# Allegro board Relay.brd
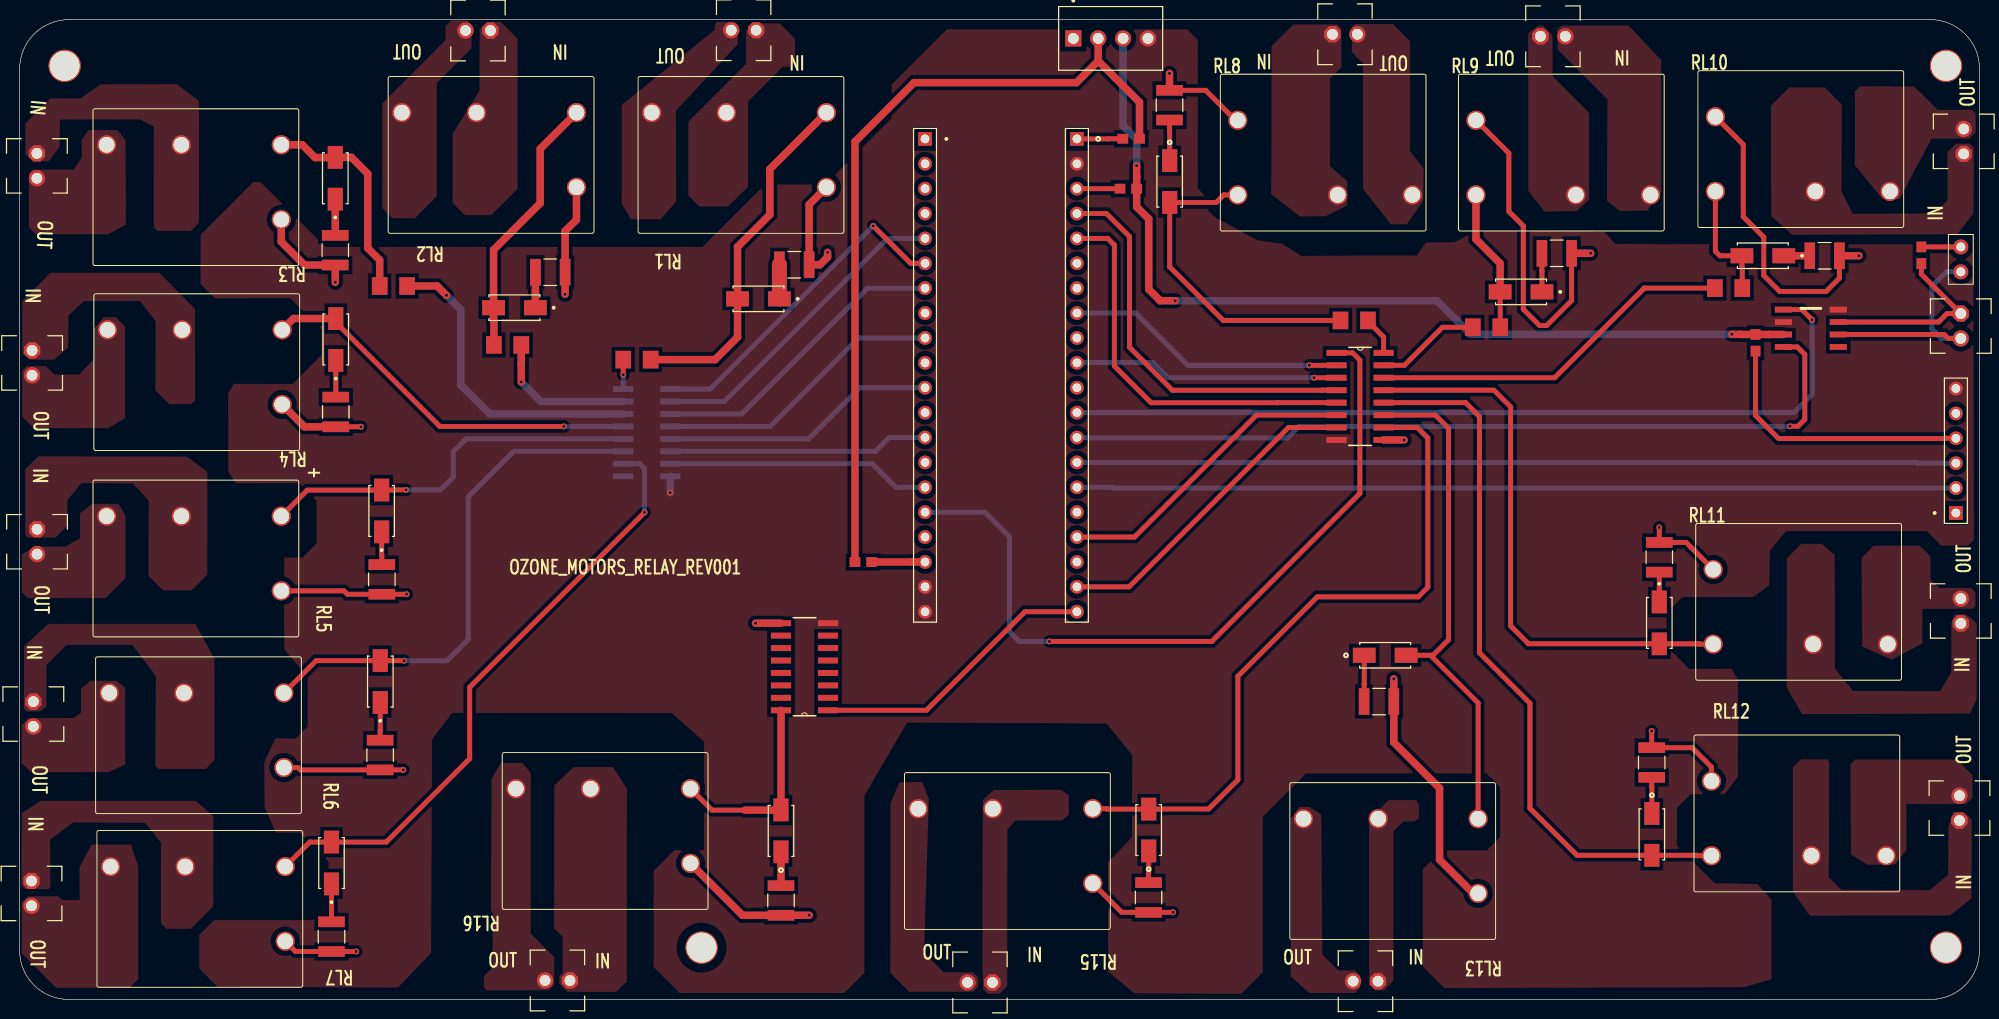
[diagram p0: board, top side]
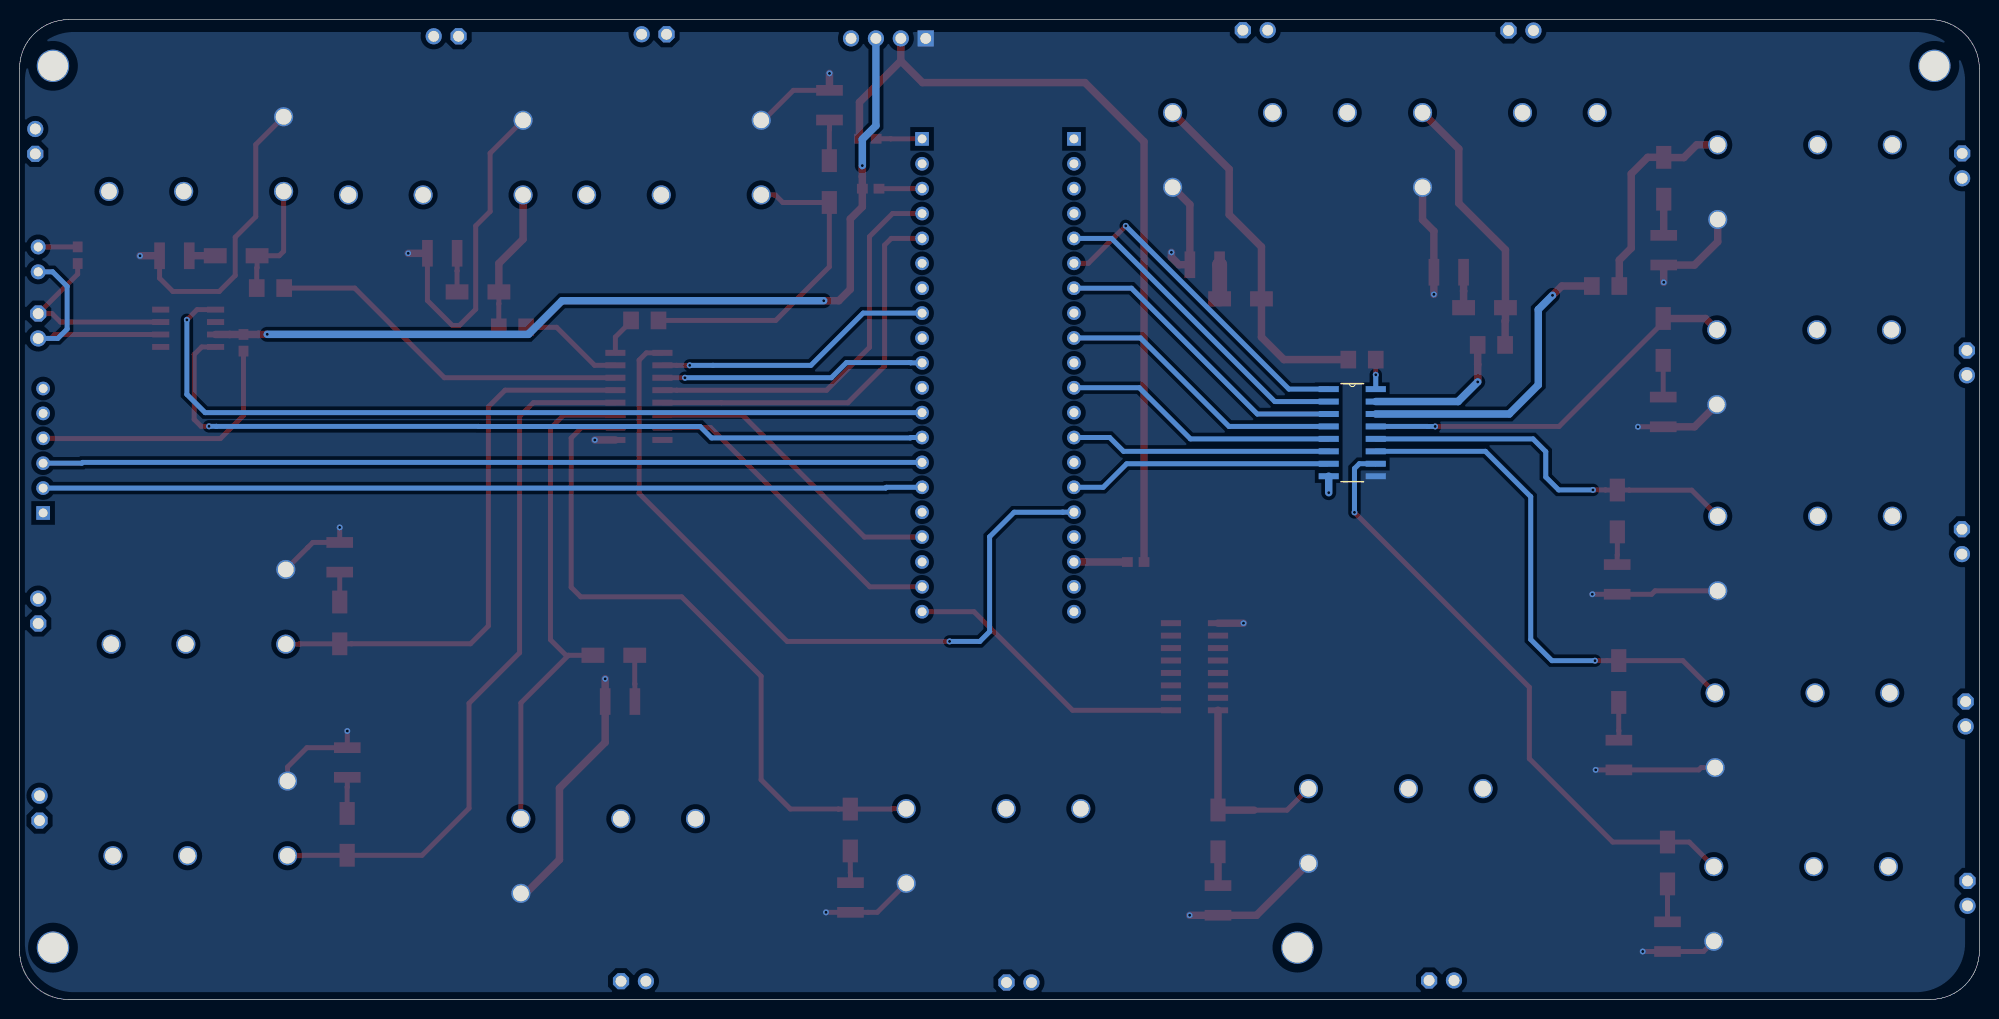
[diagram p1: board, bottom side, seen from below]

Outline 200 x 100 mm; copper layers: TOP, BOTTOM. Coordinates in mm from the lower left corner of the outline.
Outline path: 0,94.88 arc(1.5,98.5) 5.12,100 195,100 arc(196.91,99.62) 198.54,98.54 198.66,98.42 arc(199.65,96.93) 200,95.18 200,4.85 arc(198.58,1.42) 195.16,0 4.96,0 arc(1.45,1.45) 0,4.96 0,94.88 ; 0,95 arc(1.47,98.54) 5,100 195,100 arc(198.54,98.54) 200,95 200,5 arc(198.54,1.46) 195,0 5,0 arc(1.47,1.46) 0,5 0,95

## Placement (name value [footprint] x y rotation side)
D9  DIODE  [DIOM5226X240N]  75.4 71.5 180 top
D10  DIODE  [DIOM5226X240N]  50.5 70.6 180 top
D11  DIODE  [DIOM5226X240N]  32.22 83.81 90 top
D12  DIODE  [DIOM5226X240N]  32.27 67.36 90 top
D13  DIODE  [DIOM5226X240N]  36.95 49.85 90 top
D14  DIODE  [DIOM5226X240N]  36.81 32.44 90 top
D15  DIODE  [DIOM5226X240N]  31.83 13.92 90 top
D16  DIODE  [DIOM5226X240N]  77.7 17.2 90 top
D17  DIODE  [DIOM5226X240N]  153.23 72.21 180 top
D18  DIODE  [DIOM5226X240N]  177.9 75.9 180 top
D19  DIODE  [DIOM5226X240N]  167.33 38.43 270 top
D20  DIODE  [DIOM5226X240N]  166.58 16.84 270 top
D21  DIODE  [DIOM5226X240N]  139.36 35.12 0 top
D22  DIODE  [DIOM5226X240N]  115.23 17.29 90 top
D23  DIODE  [DIOM5226X240N]  117.37 83.47 270 top
J1  CON2  [1725656]  75.17 98.92 180 top
J2  CON2  [1725656]  48.05 98.89 180 top
J3  CON2  [1725656]  1.76 86.35 270 top
J4  CON2  [1725656]  1.28 66.24 270 top
J5  CON2  [1725656]  1.78 47.99 270 top
J6  CON2  [1725656]  1.4 30.4 270 top
J7  CON2  [1725656]  1.21 12.09 270 top
J8  CON2  [1725656]  56.16 1.93 180 top
J9  CON2  [1725656]  133.98 98.51 0 top
J10  CON2  [1725656]  155.2 98.3 0 top
J11  CON2  [1725656]  198.4 86.3 90 top
J12  CON2  [1725656]  198.1 38.37 90 top
J13  CON2  [1725656]  197.97 18.25 90 top
J14  CON2  [1725656]  138.63 1.86 180 top
J15  CON2  [1725656]  99.28 1.73 180 top
J16  CON20  [TE_2-87224-0]  92.4 63.7 270 top
J17  CON20  [TE_2-87224-0]  107.9 63.7 270 top
J18  CON2  [JUMPER2]  198.1 76.8 270 top
J19  CON2  [1725656]  198.1 70 270 top
J20  UART  [TE_4-103327-6]  197.6 56 90 top
J21  Power  [TE_1546215-4]  111.34 98.08 0 top
NOREF  -  [unnamed]  69.58 5.53 0 top
NOREF#2  -  [unnamed]  4.58 95.53 0 top
NOREF#3  -  [unnamed]  196.58 5.53 0 top
NOREF#4  -  [unnamed]  196.58 95.53 0 top
R1  0 OHM  [RESC3216X65]  63 65.3 0 top
R2  120K  [RESC3225X60N]  79.06 74.98 0 top
R3  120K  [RESC3225X60N]  54.16 74.22 0 top
R4  0 OHM  [RESC3216X65]  49.8 66.8 180 top
R5  120K  [RESC3225X60N]  32.22 76.47 270 top
R6  0 OHM  [RESC3216X65]  38.15 72.81 180 top
R7  120K  [RESC3225X60N]  32.27 59.96 270 top
R8  120K  [RESC3225X60N]  36.96 42.87 270 top
R9  120K  [RESC3225X60N]  36.79 24.94 270 top
R10  120K  [RESC3225X60N]  31.83 6.4 270 top
R11  0 OHM  [RESC3216X65]  136.2 69.3 180 top
R12  120K  [RESC3225X60N]  117.35 91.27 90 top
R13  120K  [RESC3225X60N]  156.87 76.15 0 top
R14  0 OHM  [RESC3216X65]  149.7 68.6 0 top
R15  120K  [RESC3225X60N]  184.2 75.9 0 top
R16  0 OHM  [RESC3216X65]  174.4 72.6 0 top
R17  120K  [RESC3225X60N]  167.33 45.12 90 top
R18  120K  [RESC3225X60N]  166.56 24.18 90 top
R19  120K  [RESC3225X60N]  138.73 30.4 0 top
R20  120K  [RESC3225X60N]  115.21 10.4 270 top
R21  0R  [0603]  86.1 44.64 180 top
R22  0R  [0603]  113.15 82.75 0 top
R23  0R  [0603]  113.44 87.84 0 top
R24  0R  [0603]  177.15 67.02 90 top
R25  120R  [0603]  194.08 75.96 90 top
R26  120K  [RESC3225X60N]  77.7 10.1 270 top
RL1  RELAY SPST  [3122644]  82.33 82.89 180 top
RL2  RELAY SPST  [3122644]  56.83 82.89 180 top
RL3  RELAY SPST  [3122644]  26.7 79.6 180 top
RL4  RELAY SPST  [3122644]  26.79 60.72 180 top
RL5  RELAY SPST  [3122644]  26.7 41.7 180 top
RL6  RELAY SPST  [3122644]  26.97 23.66 180 top
RL7  RELAY SPST  [3122644]  27.11 5.93 180 top
RL8  RELAY SPST  [3122644]  124.32 89.73 0 top
RL9  RELAY SPST  [3122644]  148.62 89.73 0 top
RL10  RELAY SPST  [3122644]  173.06 90.09 0 top
RL11  RELAY SPST  [3122644]  172.84 43.88 0 top
RL12  RELAY SPST  [3122644]  172.66 22.29 0 top
RL13  RELAY SPST  [3122644]  148.84 10.82 180 top
RL15  RELAY SPST  [3122644]  109.52 11.84 180 top
RL16  RELAY SPST  [3122644]  68.47 13.89 180 top
U1  ULN2003A  [SOIC127P600X175-16N]  61.6 53.4 180 bottom
U2  ULN2003A  [SOIC127P600X175-16N]  139.2 57.1 0 top
U3  TJA1050  [SOP8]  182.8 68.5 270 top
U4  ULN2003A  [SOIC127P600X175-16N]  77.7 38.4 180 top

## Library data of the parts
D9 D10 D12-D17 D19-D23 = DIODE_16
D11 D18 = DIODE_17
J1-J15 J18 J19 = CON2_0
J16 = CON20_3
J17 = CON20_2
J20 = CON6_0
J21 = CON4_0
R1 R4 R6 R11 R14 R16 = RESISTOR_4
R2 R3 R5 R7-R10 R12 R13 R15 R17-R20 R26 = RESISTOR_6
R21-R25 = R
RL1 = RELAY SPST_0
RL2 RL4-RL13 RL15 RL16 = RELAY SPST_1
RL3 = RELAY SPST_2
U1 U2 = ULN2003A_1
U3 = TPS563200_1
U4 = ULN2003A_0

## Footprints (pads in the part's own frame, mm; a bottom-side part is the same pattern mirrored in y, then rotated)
0603
  rect 1.1x1 smd: 1(-0.85,0) 2(0.85,0)
1725656
  rrect 1.65x1.65 hole 1.1: 1(0,0)
  round 1.65 hole 1.1: 2(2.54,0)
3122644
  round 1.95 hole 1.6: 1(0,0) 2(0,-7.62) 3(10.2,-7.62) 4(17.82,-7.62)
DIOM5226X240N
  rect 2.33x1.55 smd: A(2.135,0) C(-2.135,0)
JUMPER2
  round 1.524 hole 0.914: 1(0,0) 2(2.54,0)
RESC3216X65
  rect 1.6x1.8 smd: 1(-1.4,0) 2(1.4,0)
RESC3225X60N
  rect 1.09x2.72 smd: 1(-1.515,0) 2(1.515,0)
SOIC127P600X175-16N
  rect 2.057x0.61 smd: 1(-4.801,8.89) 2(-4.801,7.62) 3(-4.801,6.35) 4(-4.801,5.08) 5(-4.801,3.81) 6(-4.801,2.54) 7(-4.801,1.27) 8(-4.801,0) 9(0,0) 10(0,1.27) 11(0,2.54) 12(0,3.81) 13(0,5.08) 14(0,6.35) 15(0,7.62) 16(0,8.89)
SOP8
  rect 0.6x1.75 smd: 1(-1.905,-2.8) 2(-0.635,-2.8) 3(0.635,-2.8) 4(1.905,-2.8) 5(1.905,2.8) 6(0.635,2.8) 7(-0.635,2.8) 8(-1.905,2.8)
TE_2-87224-0
  rect 1.397x1.397 hole 0.889: 1(-24.13,0)
  round 1.397 hole 0.889: 2(-21.59,0) 3(-19.05,0) 4(-16.51,0) 5(-13.97,0) 6(-11.43,0) 7(-8.89,0) 8(-6.35,0) 9(-3.81,0) 10(-1.27,0) 11(1.27,0) 12(3.81,0) 13(6.35,0) 14(8.89,0) 15(11.43,0) 16(13.97,0) 17(16.51,0) 18(19.05,0) 19(21.59,0) 20(24.13,0)
TE_4-103327-6
  rect 1.398x1.398 hole 0.89: 1(-6.35,0)
  round 1.398 hole 0.89: 2(-3.81,0) 3(-1.27,0) 4(1.27,0) 5(3.81,0) 6(6.35,0)
TE_1546215-4
  rect 1.65x1.65 hole 1.1: 1(-3.81,0)
  round 1.65 hole 1.1: 2(-1.27,0) 3(1.27,0) 4(3.81,0)
unnamed
  round 3.302 hole 3.048: (0.013,-0.244)

## Nets
3V3: J21.2 R21.2 R23.2
5VCC: J21.3 R22.2 R24.2 U3.3(VDD)
+12V: J21.1 R2.2 R3.2 R5.2 R7.2 R8.2 R9.2 R10.2 R12.2 R13.2 R15.2 R17.2 R18.2 R19.2 R20.2 R26.2 RL1.1(COIL1) RL2.1 RL3.1 RL4.1 RL5.1 RL6.1 RL7.1 RL8.1 RL9.1 RL10.1 RL11.1 RL12.1 RL13.1 RL15.1 RL16.1 U1.9(COM) U2.9(COM) U4.9(COM)
GND: J16.19 J16.20 J17.2 J20.6 J21.4 U1.8(GND) U2.8(GND) U3.2(VSS) U3.8(RS) U4.8(GND)
F1: J16.4
F2: J16.3
F3: J16.8
F4: J16.10
F5: J16.12
F6: J16.14
F9: J17.6
F10: J17.7
F11: J17.9
F12: J17.11
F13: J17.16
F14: J17.18
P_RX: J17.14 J20.3
P_TX: J17.15 J20.2
PB15/OUT: D15.A RL7.2 U1.10(7C)
R_RLY_IN: D9.A R1.2(B) RL1.2(COIL2)
R_RLY_IN_77343: D23.A R11.2(B) RL8.2
RE1: J1.1 RL1.3(COMMON)
RE1/OUT: J1.2 RL1.4(NO)
RE2: J2.1 RL2.3
RE2/OUT: J2.2 RL2.4
RE3: J3.1 RL3.3
RE3/OUT: J3.2 RL3.4
RE4: J4.1 RL4.3
RE4/OUT: J4.2 RL4.4
RE5: J5.1 RL5.3
RE5/OUT: J5.2 RL5.4
RE6: J6.1 RL6.3
RE6/OUT: J6.2 RL6.4
RE7: J7.1 RL7.3
RE7/OUT: J7.2 RL7.4
RE8: J9.1 RL8.3
RE8/OUT: J9.2 RL8.4
RE9: J10.1 RL9.3
RE9/OUT: J10.2 RL9.4
RE10: J11.1 RL10.3
RE10/OUT: J11.2 RL10.4
RE11: J12.1 RL11.3
RE11/OUT: J12.2 RL11.4
RE12: J13.1 RL12.3
RE12/OUT: J13.2 RL12.4
RE13: J14.1 RL13.3
RE13/OUT: J14.2 RL13.4
RE14: D22.A RL15.2 U2.10(7C)
RE14/OUT: J15.2 RL15.4
RE14IN: J15.1 RL15.3
RE15: J8.1 RL16.3
RE15/OUT: J8.2 RL16.4
REL1: J16.6 U1.1(1B)
REL2: J16.5 U1.2(2B)
REL3: J16.7 U1.3(3B)
REL4: J16.9 U1.4(4B)
REL5: J16.11 U1.5(5B)
REL6: J16.13 U1.6(6B)
REL7: J16.15 U1.7(7B)
REL8: J16.16 U2.1(1B)
REL9: J17.8 U2.2(2B)
REL10: J17.10 U2.3(3B)
REL11: J17.4 U2.4(4B)
REL12: J17.5 U2.5(5B)
REL13: J17.17 U2.6(6B)
REL14: J17.19 U2.7(7B)
REL15: J17.20 U4.1(1B)
RXD: J17.13 U3.4(RXD)
TXD: J17.12 U3.1(TXD)
Y_RLY_IN: D11.A R6.2(B) RL3.2
Y_RLY_IN_77347: D18.A R16.2(B) RL10.2
N62759: J17.1 R23.1
N63115: J19.1 R25.1 U3.7(CANH)
N63135: J18.2 J19.2 U3.6(CANL)
N63175: J18.1 R25.2
N63380: J17.3 R22.1
N65482: J16.18 R21.1
N68083: D10.A R4.2(B) RL2.2
N68351: D12.A RL4.2 U1.13(4C)
N68452: D13.A RL5.2 U1.12(5C)
N68553: D14.A RL6.2 U1.11(6C)
N75685: D16.A RL16.2 U4.16(1C)
N75693: D16.C R26.1
N77327: D18.C R15.1
N77341: D23.C R12.1
N77357: R11.1(A) U2.16(1C)
N77361: R16.1(A) U2.14(3C)
N77381: R14.1(A) U2.15(2C)
N77393: D17.C R13.1
N77395: D17.A R14.2(B) RL9.2
N77409: D19.C R17.1
N77411: D19.A RL11.2 U2.13(4C)
N77427: D20.C R18.1
N77429: D20.A RL12.2 U2.12(5C)
N77445: D21.C R19.1
N77447: D21.A RL13.2 U2.11(6C)
N77463: D22.C R20.1
N80676: J20.4 R24.1
N20681583: D11.C R5.1
N20681625: D9.C R2.1
N20681734: R1.1(A) U1.16(1C)
N20681738: R6.1(A) U1.14(3C)
N20741071: R4.1(A) U1.15(2C)
N20741150: D10.C R3.1
N20741386: D12.C R7.1
N20741709: D13.C R8.1
N20741894: D14.C R9.1
N20742069: D15.C R10.1

Pads without a net: J16 1 2 17; J20 1 5; U3 5; U4 2 3 4 5 6 7 10 11 12 13 14 15

## Via types
v1: diameter 0.61, hole 0.305, TOP to BOTTOM, 34 vias

## Routing (per net, layer and track width the routed paths; a pad name or vN(x,y) marks a point on that pad's centre or on a via; arc(x,y) is an arc through that point)
3V3: length 83.1
  TOP w0.762: 110.07,95.79 114.29,91.57 R23.2 ; 110.07,95.79 107.86,93.57 91.28,93.57 85.25,87.55 R21.2 ; 110.07,95.79 J21.2
5VCC: length 93.4
  TOP w0.762: v1(174.73,67.88) 175.62,67.88 175.64,67.87 R24.2 178.57,67.87 178.57,67.87 U3.3 ; v1(117.94,71.31) 116.4,71.31 115.23,72.48 115.23,79.66 114,80.89 R22.2 114,83.99 v1(114,85.1)
  BOTTOM w0.762: v1(174.73,67.88) 148.08,67.88 144.65,71.31 v1(117.94,71.31) ; v1(114,85.1) 114,87.79 112.61,89.17 J21.3
+12V: length 223.8
  TOP w0.508: RL10.1 175.9,87.24 175.9,79.89 178,77.79 178,73.88 179.63,72.26 184.36,72.26 185.72,73.61 R15.2 ; v1(166.56,27.39) R18.2 170.68,25.69 172.66,23.72 RL12.1 ; R7.2 v1(34.85,58.44) ; RL8.1 124.09,89.73 121.04,92.78 R12.2 ; v1(39.5,41.35) R8.2 33.45,41.35 33.1,41.7 RL5.1 ; v1(117.71,8.89) R20.2 112.48,8.89 RL15.1 ; RL7.1 28.15,4.89 R10.2 v1(34.36,4.89) ; v1(39.16,23.43) R9.2 28.64,23.43 28.4,23.66 RL6.1 ; RL9.1 151.98,86.37 151.98,80.42 153.46,78.95 153.46,70.44 155.12,68.78 155.84,68.78 158.38,71.33 R13.2 ; RL11.1 170.59,46.13 170.08,46.64 R17.2 v1(167.33,48.17)
  TOP w0.762: R12.2 v1(117.35,94.51) ; U2.9 v1(141.3,57.1) ; v1(55.67,71.96) R3.2 55.67,78.41 56.83,79.57 RL2.1 ; RL13.1 148.35,10.82 144.91,14.26 144.91,21.56 140.24,26.23 R19.2 v1(140.24,32.72) ; v1(32.22,73.19) R5.2 29.08,74.95 26.7,77.33 RL3.1 ; RL16.1 73.77,8.58 R26.2 v1(80.59,8.58) ; RL4.1 29.07,58.44 R7.2 ; R13.2 v1(160.34,76.15) ; U4.9 v1(75.1,38.4) ; v1(82.46,76.25) 82.46,75.77 81.68,74.98 R2.2 80.57,81.13 RL1.1 ; R15.2 v1(187.71,75.9)
GND: length 1.7
  BOTTOM w0.762: U1.8 v1(66.4,51.72)
P_RX: length 89.7
  BOTTOM w0.508: J17.14 193.57,54.81 193.65,54.73 J20.3
P_TX: length 89.7
  BOTTOM w0.508: J20.2 111.62,52.19 111.54,52.27 J17.15
PB15/OUT: length 62.8
  TOP w0.508: v1(63.78,49.71) 45.93,31.86 45.93,24.57 37.42,16.06 D15.A 29.61,16.06 RL7.2
  BOTTOM w0.508: v1(63.78,49.71) 63.78,54.18 63.28,54.68 61.61,54.68 U1.10
R_RLY_IN: length 36.5
  TOP w0.762: RL1.2 76.56,84.74 76.56,80.1 73.27,76.81 D9.A 73.27,67.6 70.97,65.3 R1.2
R_RLY_IN_77343: length 33.5
  TOP w0.508: R11.2 122.84,69.3 117.37,74.77 D23.A 122.11,81.34 122.89,82.11 RL8.2
RE14: length 70
  TOP w0.508: RL15.2 110.95,19.46 111,19.42 D22.A 116.43,19.42 116.45,19.43 121.34,19.43 124.33,22.42 124.33,32.98 132.43,41.09 142.74,41.09 143.71,42.06 143.71,57.29 142.64,58.37 U2.10
REL1: length 34.5
  TOP w0.508: v1(87.12,78.95) 90.93,75.13 J16.6
  BOTTOM w0.508: U1.1 70.46,62.29 v1(87.12,78.95)
REL2: length 32.9
  BOTTOM w0.508: U1.2 71.91,61.02 88.56,77.67 J16.5
REL3: length 31.3
  BOTTOM w0.508: U1.3 73.7,59.75 86.54,72.59 J16.7
REL4: length 29.7
  BOTTOM w0.508: U1.4 76.59,58.48 85.62,67.51 J16.9
REL5: length 28.2
  BOTTOM w0.508: J16.11 85.74,62.43 80.52,57.21 U1.5
REL6: length 26.6
  BOTTOM w0.508: J16.13 88.76,57.35 87.35,55.94 U1.6
REL7: length 27
  BOTTOM w0.508: U1.7 87.02,54.67 89.42,52.27 J16.15
REL8: length 78.1
  TOP w0.508: v1(105.1,36.54) 121.67,36.54 136.78,51.65 136.78,65.25 136.04,65.99 U2.1
  BOTTOM w0.508: J16.16 93.56,49.73 93.56,49.73 98.5,49.73 101.01,47.22 101.01,37.53 102.01,36.54 v1(105.1,36.54)
REL9: length 28.7
  TOP w0.508: U2.2 132.94,64.72 132.93,64.71 v1(131.62,64.71)
  BOTTOM w0.508: v1(131.62,64.71) 129.24,64.71 129.24,64.71 119.25,64.71 113.91,70.05 J17.8
REL10: length 27.2
  TOP w0.508: U2.3 v1(132.1,63.45)
  BOTTOM w0.508: J17.10 109.06,64.97 109.09,65 115.62,65 117.16,63.45 v1(132.1,63.45)
REL11: length 40.6
  TOP w0.508: J17.4 110.91,80.21 113.27,77.85 113.27,66.55 117.65,62.17 132.93,62.17 132.94,62.18 U2.4
REL12: length 40.7
  TOP w0.508: J17.5 111.05,77.67 111.73,76.99 111.73,64.64 115.47,60.9 128.38,60.9 128.39,60.91 U2.5
REL13: length 31.7
  TOP w0.508: U2.6 126.23,59.64 113.78,47.19 J17.17
REL14: length 33.2
  TOP w0.508: U2.7 129.49,58.37 113.23,42.11 J17.19
REL15: length 29.6
  TOP w0.508: J17.20 102.6,39.57 92.54,29.51 U4.1
RXD: length 84.2
  TOP w0.508: v1(180.67,58.49) 181.48,58.49 182.19,59.2 182.19,65.82 181.42,66.6 U3.4
  BOTTOM w0.508: v1(180.67,58.49) 179.91,58.49 179.9,58.48 153.16,58.48 153.15,58.47 130.55,58.47 129.39,57.31 109.1,57.31 109.06,57.35 J17.13
TXD: length 86.8
  TOP w0.508: U3.1 181.89,70.41 v1(182.93,69.36)
  BOTTOM w0.508: v1(182.93,69.36) 182.93,61.75 181.07,59.89 J17.12
Y_RLY_IN: length 22
  TOP w0.762: R6.2 36.75,75.46 35.53,76.67 35.53,84.26 33.85,85.94 D11.A 32.19,85.92 30.15,85.92 28.85,87.22 RL3.2
Y_RLY_IN_77347: length 12.3
  TOP w0.508: R16.2 175.8,74.66 175.77,74.69 D18.A 173.52,75.9 173.06,76.36 RL10.2
N62759: length 4.7
  TOP w0.508: J17.1 111.1,87.83 111.12,87.84 R23.1
N63115: length 19.6
  TOP w0.508: R25.1 194.08,74.03 J19.1 196.69,70 195.83,69.14 U3.7
N63135: length 23.9
  TOP w0.508: U3.6 196.42,67.87 196.82,67.46 J19.2
  BOTTOM w0.508: J19.2 196.11,67.46 195.15,68.42 195.15,72.78 196.63,74.26 J18.2
N63175: length 4
  TOP w0.508: J18.1 196.88,76.8 196.88,76.81 R25.2
N63380: length 4.4
  TOP w0.508: J17.3 109.06,82.75 109.06,82.75 R22.1
N65482: length 5.5
  TOP w0.762: J16.18 91.12,44.65 91.11,44.64 R21.1
N68083: length 27.2
  TOP w0.762: R4.2 48.4,69.23 48.37,69.27 D10.A 48.37,76.5 53.13,81.26 53.13,86.81 RL2.2
N68351: length 40.1
  TOP w0.508: D12.A 32.27,69.11 42.9,58.48 v1(55.54,58.48)
  TOP w0.762: D12.A 27.95,69.5 RL4.2
  BOTTOM w0.508: v1(55.54,58.48) 56.3,58.48 56.3,58.48 U1.13
N68452: length 39.7
  TOP w0.508: v1(39.44,52) 38.17,52 38.15,51.99 D13.A 35.74,51.99 35.73,51.97 29.36,51.97 RL5.2
  BOTTOM w0.508: U1.12 45.56,57.21 44.25,55.91 44.25,53.32 42.94,52 v1(39.44,52)
N68553: length 53.4
  TOP w0.508: RL6.2 30.27,34.58 D14.A 38.01,34.58 38.02,34.57 v1(39.23,34.57)
  BOTTOM w0.508: v1(39.23,34.57) 43.63,34.57 45.79,36.73 45.79,51.31 50.42,55.94 U1.11
N75685: length 20.3
  TOP w0.508: 74.03,19.32 70.66,19.32 RL16.2
  TOP w0.762: 74.03,19.32 77.68,19.32 D16.A U4.16
N75693: length 3.5
  TOP w0.762: D16.C R26.1
N77327: length 2.7
  TOP w0.762: D18.C R15.1
N77341: length 4.2
  TOP w0.508: D23.C 117.37,88.76 117.35,88.78 R12.1
N77357: length 4
  TOP w0.508: R11.1 137.6,69.2 139.2,67.6 U2.16
N77361: length 37.6
  TOP w0.508: R16.1 165.8,72.6 156.65,63.45 U2.14
N77381: length 10.7
  TOP w0.508: U2.15 141.32,64.72 145.2,68.6 R14.1
N77393: length 3.9
  TOP w0.508: R13.1 155.35,74.36 155.36,74.35 D17.C
N77395: length 14.5
  TOP w0.508: R14.2 151.1,70.99 151.09,71 D17.A
  TOP w0.762: RL9.2 148.62,77.59 151.09,75.12 D17.A
N77409: length 3
  TOP w0.508: D19.C R17.1
N77411: length 57.5
  TOP w0.508: RL11.2 171.41,36.26 171.37,36.29 D19.A 166.13,36.29 166.12,36.3 153.98,36.3 152.16,38.12 152.16,60.47 150.46,62.18 U2.13
N77427: length 3.7
  TOP w0.508: R18.1 166.56,21.69 166.58,21.67 D20.C
N77429: length 73
  TOP w0.508: U2.12 147.57,60.91 148.98,59.5 148.98,35.38 154.14,30.22 154.14,19.51 158.93,14.71 D20.A 171.18,14.71 171.23,14.67 RL12.2
N77445: length 4.7
  TOP w0.508: D21.C 137.23,32.21 137.21,32.19 R19.1
N77447: length 52.4
  TOP w0.508: 143.98,35.12 148.84,30.26 RL13.2 ; 143.98,35.12 D21.A ; 143.98,35.12 144.24,35.12 145.83,36.71 145.83,58.29 144.48,59.64 U2.11
N77463: length 3.2
  TOP w0.508: R20.1 115.21,12.89 115.23,12.91 D22.C
N80676: length 28
  TOP w0.508: J20.4 196.45,57.27 196.42,57.24 179.51,57.24 177.15,59.6 R24.1
N20681583: length 3.7
  TOP w0.762: D11.C R5.1
N20681625: length 3.5
  TOP w1.524: D9.C 77.54,74.98 R2.1
N20681734: length 3
  TOP w0.508: R1.1 v1(61.6,63.76)
  BOTTOM w0.508: v1(61.6,63.76) U1.16
N20681738: length 32
  TOP w0.762: v1(43.57,71.86) 42.61,72.81 R6.1
  BOTTOM w0.762: U1.14 47.98,59.75 45.02,62.72 45.02,70.41 v1(43.57,71.86)
N20741071: length 15
  TOP w0.762: v1(51.2,63.02) 51.2,64.8 51.2,64.8 R4.1
  BOTTOM w0.762: U1.15 53.2,61.02 v1(51.2,63.02)
N20741150: length 3.6
  TOP w0.762: R3.1 52.64,72.3 52.64,72.3 D10.C
N20741386: length 3.8
  TOP w0.508: D12.C R7.1
N20741709: length 3.3
  TOP w0.508: D13.C 36.95,45.38 36.96,45.36 R8.1
N20741894: length 3.9
  TOP w0.508: D14.C 36.81,27.45 36.79,27.43 R9.1
N20742069: length 3.9
  TOP w0.508: D15.C R10.1

## Copper pours and planes (outline as drawn; the poured copper is in the pictures)
+12V on BOTTOM: 199.46,5.74 198,2.2 194.46,0.74 6.46,0.74 2.93,2.2 1.46,5.74 1.46,93.74 2.93,97.28 6.46,98.74 194.46,98.74 198,97.27 199.46,93.74
GND on TOP: 69.69,76.79 76.08,83.18 82.23,83.18 88.99,89.95 88.99,93.38 94.62,99.01 119.14,99.01 120.24,97.91 120.24,82.77 121.17,81.84 121.32,80.48 122.15,79.71 123.59,79 124.89,78.25 126.34,77.48 128.84,77.13 130.8,75.88 137.1,75.92 142.59,75.92 143.53,77.25 145.49,77.27 146.37,77.27 147.17,77.65 148.61,78.44 161.67,78.4 162.85,77.11 164.67,77.11 167.75,77.08 170.34,77.09 173.98,77.07 192.62,77.07 199.38,77.09 199.44,46.91 198.85,46.32 196.1,46.32 194.63,47.79 180.28,47.8 178.61,45.78 178.57,42.29 176.94,41.07 169.68,41.06 168.06,39.45 168.06,36.07 170.4,33.73 174.7,33.75 175.37,32.62 175.37,27.48 175.35,24.96 175.36,22.75 174,20.93 170.54,20.94 169.13,19.53 169.13,15.72 173.01,11.84 174.47,11.85 177.37,11.76 178.77,10.2 178.77,2.05 175.96,1.25 145.4,1.16 143.2,3.35 143.2,13.28 145.12,15.2 149.72,15.2 151.08,16.56 151.08,21.69 149.71,23.07 131.3,23.07 126.87,18.64 126.87,2.77 124.67,0.57 113.78,0.62 111.1,2.81 111.08,6.89 111.08,10.44 111.06,13.97 113.51,16.56 113.56,24.9 110.92,28.16 90.57,28.25 86.21,20.78 86.21,2.69 84.18,0.66 67.36,0.66 64.71,3.3 64.71,13.13 66.82,15.24 69.85,15.24 69.85,26.3 66.55,29.23 44.15,29.25 42.1,26.57 42,4.74 38.6,1.21 20.19,1.29 18.33,3.15 18.33,6.58 19.84,8.09 29.87,8.09 31.52,9.74 31.52,14.07 28.57,17.02 26.15,17.02 24.99,19.66 24.97,23.35 24.96,24.22 26.13,26.66 28.17,26.62 29.4,27.85 29.4,33.01 28.71,33.7 27.02,35.72 26.99,39.26 27,40.51 27.02,45.1 28.86,45.09 30.3,46.53 30.3,50.89 28.52,52.68 22.1,52.67 21.3,53.84 21.29,54.87 21.29,55.84 21.29,57.92 21.28,61.87 21.86,62.82 27.86,62.81 30.82,65.76 30.82,68.37 27.62,71.57 19.96,71.55 18.46,73 18.46,74.34 18.46,75.64 18.49,78.08 23.85,83.42 24.61,83.42 31.23,76.79 31.23,76.79
RE1 on TOP: 69.36,80.93 72.32,80.93 74.35,82.95 74.35,91.66 77.88,95.19 78.67,95.19 79.14,95.67 79.14,98.04 77.56,99.62 74.89,99.62 74.13,98.86 74.13,95.57 74.15,95.55 74.15,95.48 68.24,89.57 68.24,82.05
RE1/OUT on TOP: 71.13,99.77 72.95,99.77 73.31,99.43 73.31,97.53 66.98,90.7 67.01,81.42 65.42,79.62 62.38,79.63 61.45,81.21 61.45,91.29 70.94,98.96 70.95,99.45
RE2 on TOP: 45.45,80.04 48.12,80.04 50.82,82.74 50.82,98.07 49.13,99.76 47.67,99.76 46.96,99.05 46.93,92.73 44.19,88.36 44.19,81.29
RE2/OUT on TOP: 44.06,99.92 45.71,99.92 46.12,99.51 46.12,97.08 42.58,93.54 42.58,81.98 40.33,79.73 38.04,79.73 37.01,80.76 37.01,91.45 43.48,97.91 43.48,99.34
RE3 on TOP: 1.35,85.51 2.96,85.53 4.09,87.02 4.11,89.8 12.31,89.82 13.69,89.07 13.7,78.81 14.08,78.43 17.47,78.43 18.3,79.26 18.31,91.69 16.04,93.42 8.27,93.4 6.18,91.95 3.13,91.96 0.6,89.42 0.6,86.26
RE3/OUT on TOP: 1.33,84.7 3.32,84.7 5.51,84.7 6.36,85.92 6.33,87.78 7.04,88.73 10,88.73 10.82,87.66 10.84,82.13 10.85,81.52 10.84,79.07 9.02,78.09 1.65,78.11 0.95,78.81 0.95,84.32
RE4 on TOP: 15.88,60.77 17.52,60.77 17.91,61.17 17.91,70.45 14.26,74.18 3.13,74.17 0.29,71.27 0.28,65.89 1.03,65.29 3.52,65.29 4.96,66.52 4.98,69.8 6.56,71.27 12.29,71.27 13.89,69.2 13.86,63.52 13.86,62.16 15.25,60.77 15.87,60.77
RE4/OUT on TOP: 10.75,65.66 10.76,59.31 9.03,58.31 1.44,58.31 0.27,59.48 0.27,64.18 0.73,64.64 2.67,64.64 3.55,63.77 6.08,63.77 7.58,65.36 7.59,68.45 8.59,69.64 9.82,69.63 10.77,68.68
RE5 on TOP: 14.64,41.75 17.56,41.75 19.16,43.35 19.16,53.85 17.06,55.41 1.91,55.43 0.57,54.09 0.58,47.42 0.87,47.13 3.65,47.13 4.89,48.36 4.88,50.97 6.31,52.68 11.57,52.66 13.18,50.89 13.15,46.95 13.15,43.24
RE5/OUT on TOP: 0.83,40.96 8.77,40.96 10.81,43 10.81,49.39 10.1,50.58 7.38,50.58 6.17,49.6 6.15,47.04 4.63,46.21 1.47,46.21 0.22,45.41 0.23,41.55
RE6 on TOP: 14.71,23.53 19,23.53 19.9,24.42 19.88,34.78 17.94,38.33 2.92,38.33 0.46,36.05 0.44,29.66 0.72,29.39 2.1,29.38 2.74,29.9 2.74,34.13 4.79,36.18 11.51,36.19 13.91,32.99 13.85,26.88 13.85,23.84 14.18,23.52 14.7,23.52
RE6/OUT on TOP: 1.13,23.19 9.05,23.19 10.78,23.98 10.78,31.81 9.87,32.52 7.21,32.53 6.28,31.73 6.27,29.25 5.52,28.73 0.92,28.72 0.2,28 0.2,24.13
RE7 on TOP: 1.87,11.26 0.55,11.26 0.2,11.61 0.22,19.01 2.13,20.27 17.98,20.27 19.77,18.7 19.77,9.5 17.48,7.21 14.98,7.21 14.43,7.76 14.43,16 12.8,18.03 5.46,18.05 3.11,16.31 3.14,12.03 3.14,11.47 2.92,11.25 1.88,11.25
RE7/OUT on TOP: 7.33,15.8 11.37,15.8 12.11,13.56 12.1,2.05 11.24,1.19 3.72,1.19 0.22,4.69 0.22,9.9 0.85,10.53 3.93,10.53 4.33,10.13 6.14,10.13 6.1,13.43
RE8 on TOP: 133.73,85.03 135.48,83.52 135.49,81.03 133.25,79.93 130.63,79.92 127.72,82.2 127.73,83.51 127.76,88.14 127.76,97.28 129.99,99.51 134.48,99.51 134.89,99.09 134.89,95.14 133.72,93.98 133.72,87.08
RE8/OUT on TOP: 136.68,99.55 140.14,99.55 141.88,97.81 141.88,86.58 143.29,84.82 143.26,81.51 141.56,79.12 139.93,79.12 137.11,82.7 137.09,86.01 137.09,95.53 135.97,96.65 135.97,99.22 136.3,99.56 136.67,99.56
RE9 on TOP: 155.02,99.4 153.95,98.63 153.97,92.79 153.97,82.5 155.62,80.42 158.89,80.45 160.18,81.64 160.19,90.47 156.44,94.22 156.44,98.41 155.45,99.4 155.02,99.4
RE9/OUT on TOP: 163.27,80.48 166.1,80.5 167.53,82.35 167.53,95.86 164.19,99.4 157.34,99.4 156.89,98.95 156.89,97.03 162.03,91.88 162,81.51
RE10 on TOP: 178.73,91.21 178.76,79.96 180.9,78.04 197.77,78.1 199.4,80.24 199.43,84.76 199.43,86.91 199,87.34 197.61,87.34 196.74,86.47 196.74,86.44 196.74,81.56 195.4,80.22 187.06,80.17 185.92,82.52 185.96,87.99 185.96,91.33 184.21,93.08 180.6,93.08
RE10/OUT on TOP: 191.1,93.17 193.37,93.17 195.74,90.79 199.25,90.79 199.63,90.41 199.63,88.51 198.97,87.85 195.11,87.85 191.84,81.68 190.11,81.69 187.29,85.14 187.3,89 187.3,92.67 187.82,93.19 191.08,93.19
RE11 on TOP: 199.03,29.18 181.9,29.12 180.32,31.87 180.34,37.37 180.34,45.02 181.81,46.5 183.91,46.49 185.23,45.39 185.25,40.9 185.25,33.79 187.11,31.48 195.99,31.46 197.14,33.4 197.13,38.39 197.46,39.29 198.63,39.3 199.73,38.41 199.73,36.94 199.72,30.61
RE11/OUT on TOP: 189.77,46.31 193.91,46.31 195.01,45.21 195.01,42.87 195.88,42 199.14,42 199.59,41.55 199.59,40.14 199.32,39.87 194.18,39.87 194.18,36.35 191.08,34.67 188.04,36.01 187.98,43.3 187.98,45.09 189.2,46.31 189.76,46.31
RE12 on TOP: 180.97,23.22 180.97,15.58 180.96,10.98 182.7,8.55 196.99,8.57 199.2,10.31 199.22,15.65 199.22,18.37 198.47,19.12 197.3,19.13 196.83,17.63 196.81,12.72 194.93,11.16 185.92,11.18 184.62,12.45 184.68,19.71 184.68,24.26 184.43,24.5 181.79,24.5 180.97,23.68 180.97,23.23
RE12/OUT on TOP: 192.55,19.95 198.64,19.93 199.29,20.59 199.29,22.91 197.71,24.48 187.32,24.48 186.84,24 186.84,21.05 186.9,14.8 188.6,13.75 191.41,13.77 192.55,15.26
RE13 on TOP: 138.64,0.92 139.22,0.92 140.2,1.89 140.2,17.16 141.19,18.15 142.33,18.16 142.81,18.5 142.8,19.84 142.52,20.35 139.7,20.34 137.72,18.37 137.72,1.51 138.32,0.92 138.64,0.92
RE13/OUT on TOP: 130.61,19.65 131.68,19.63 132.84,18.85 132.95,4.58 134.58,2.95 136.27,2.95 136.79,2.43 136.79,1.18 136.28,0.66 131.61,0.66 129.72,2.35 129.74,18.44
RE14/OUT on TOP: 90.37,22.17 92.11,22.19 92.79,20.48 92.3,4.78 94.31,2.77 97.28,2.77 97.81,2.24 97.81,1.3 97.28,0.78 90.79,0.78 88.86,2.71 88.87,19.96 89.79,22.16
RE14IN on TOP: 98.29,20.37 99.42,21.38 106.23,21.4 107.07,20.86 107.08,18.87 106.4,18.27 101.59,18.26 100.8,17.34 100.79,8.5 100.79,1.36 100,0.57 98.8,0.57 98.26,1.11 98.26,9.55
RE15 on TOP: 55.89,0.77 60.89,0.77 61.96,1.84 61.97,21.52 60.55,23.71 56.53,23.71 54.56,21.83 54.55,7.27 55.4,6.41 55.4,2.7 55.01,2.3 55.01,1.65
RE15/OUT on TOP: 48,0.93 54.02,0.93 54.56,1.48 54.56,4.33 52.16,6.74 52.16,16.66 52.17,23.08 51.33,24.14 49.07,24.11 48.16,22.48 48.1,9.02 48.27,8.85 48.27,3.26 47.39,2.38 47.39,1.2 47.65,0.93 48,0.93

## Text on the board
Ref Des/Silkscreen Top: OUT | OZONE_MOTORS_RELAY_REV001 | IN | +
NCLEGEND-1-2: FIGURE | SIZE | 12.0 | 35.0 | 35.039 | 36.0 | 43.307 | 62.992 | 120.0 | DRILL CHART: TOP to BOTTOM | ALL UNITS ARE IN MILS | TOLERANCE | +3.0/-12.0 | +0.0/-0.0 | PLATED | QTY | 34 | 40 | 6 | 2 | 36 | 60 | 4
